# Altium PCB Alarm_V2.PcbDoc
Units mil, origin at the board's own origin, x right, y up, seen from the top; angles counter-clockwise.
Board outline 4000 x 4000 mil, 2 copper layers (Top Layer, Bottom Layer); 119 components, 88 nets, 390 pads, 48 vias.
Unrouted connection lines stored in the file: 246.
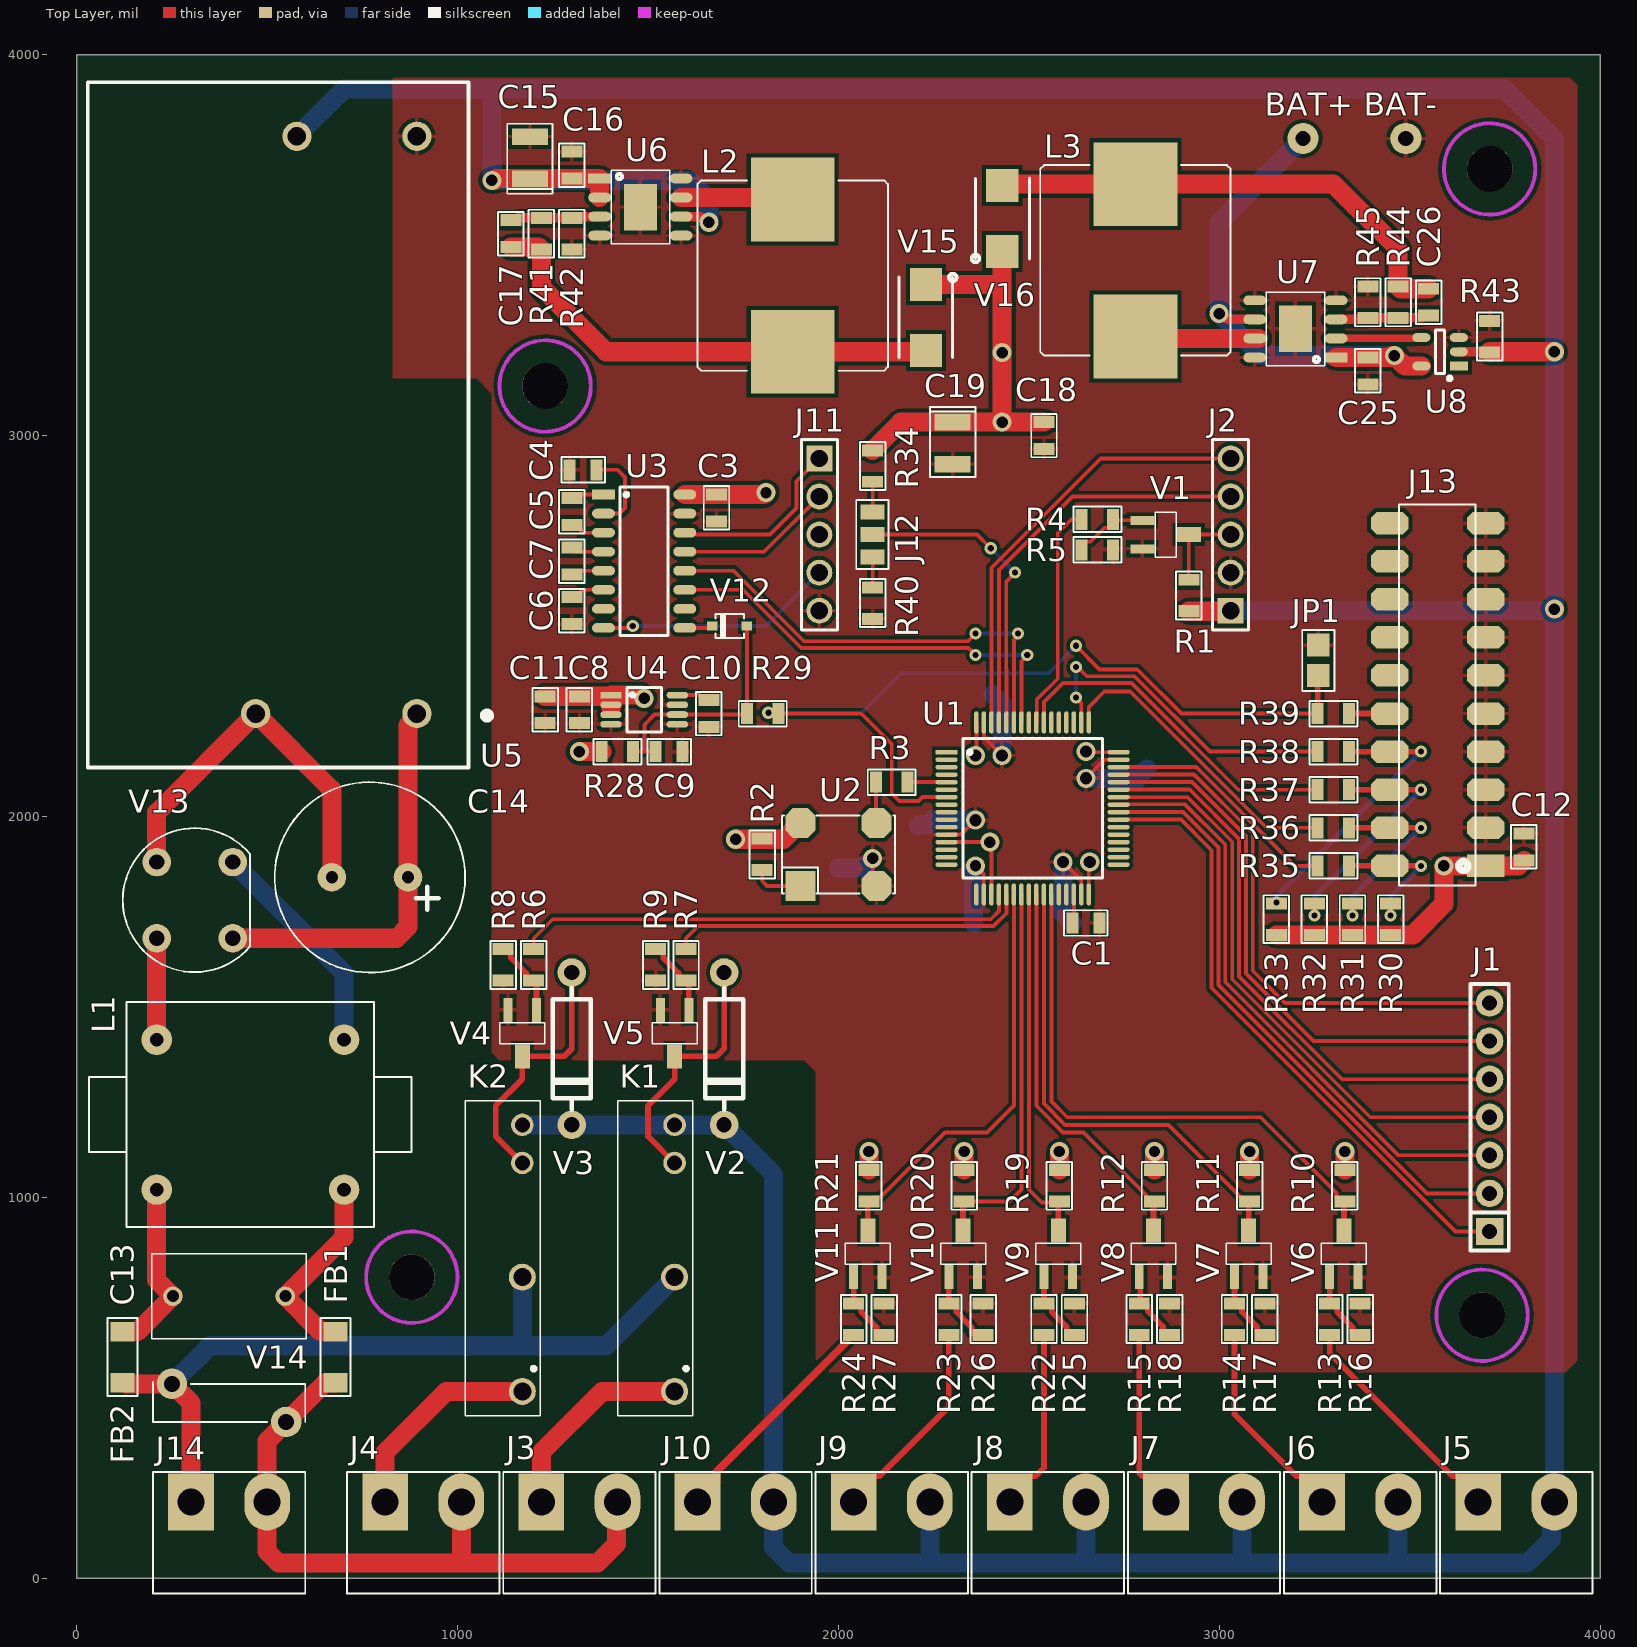
[diagram p0: Top Layer view]
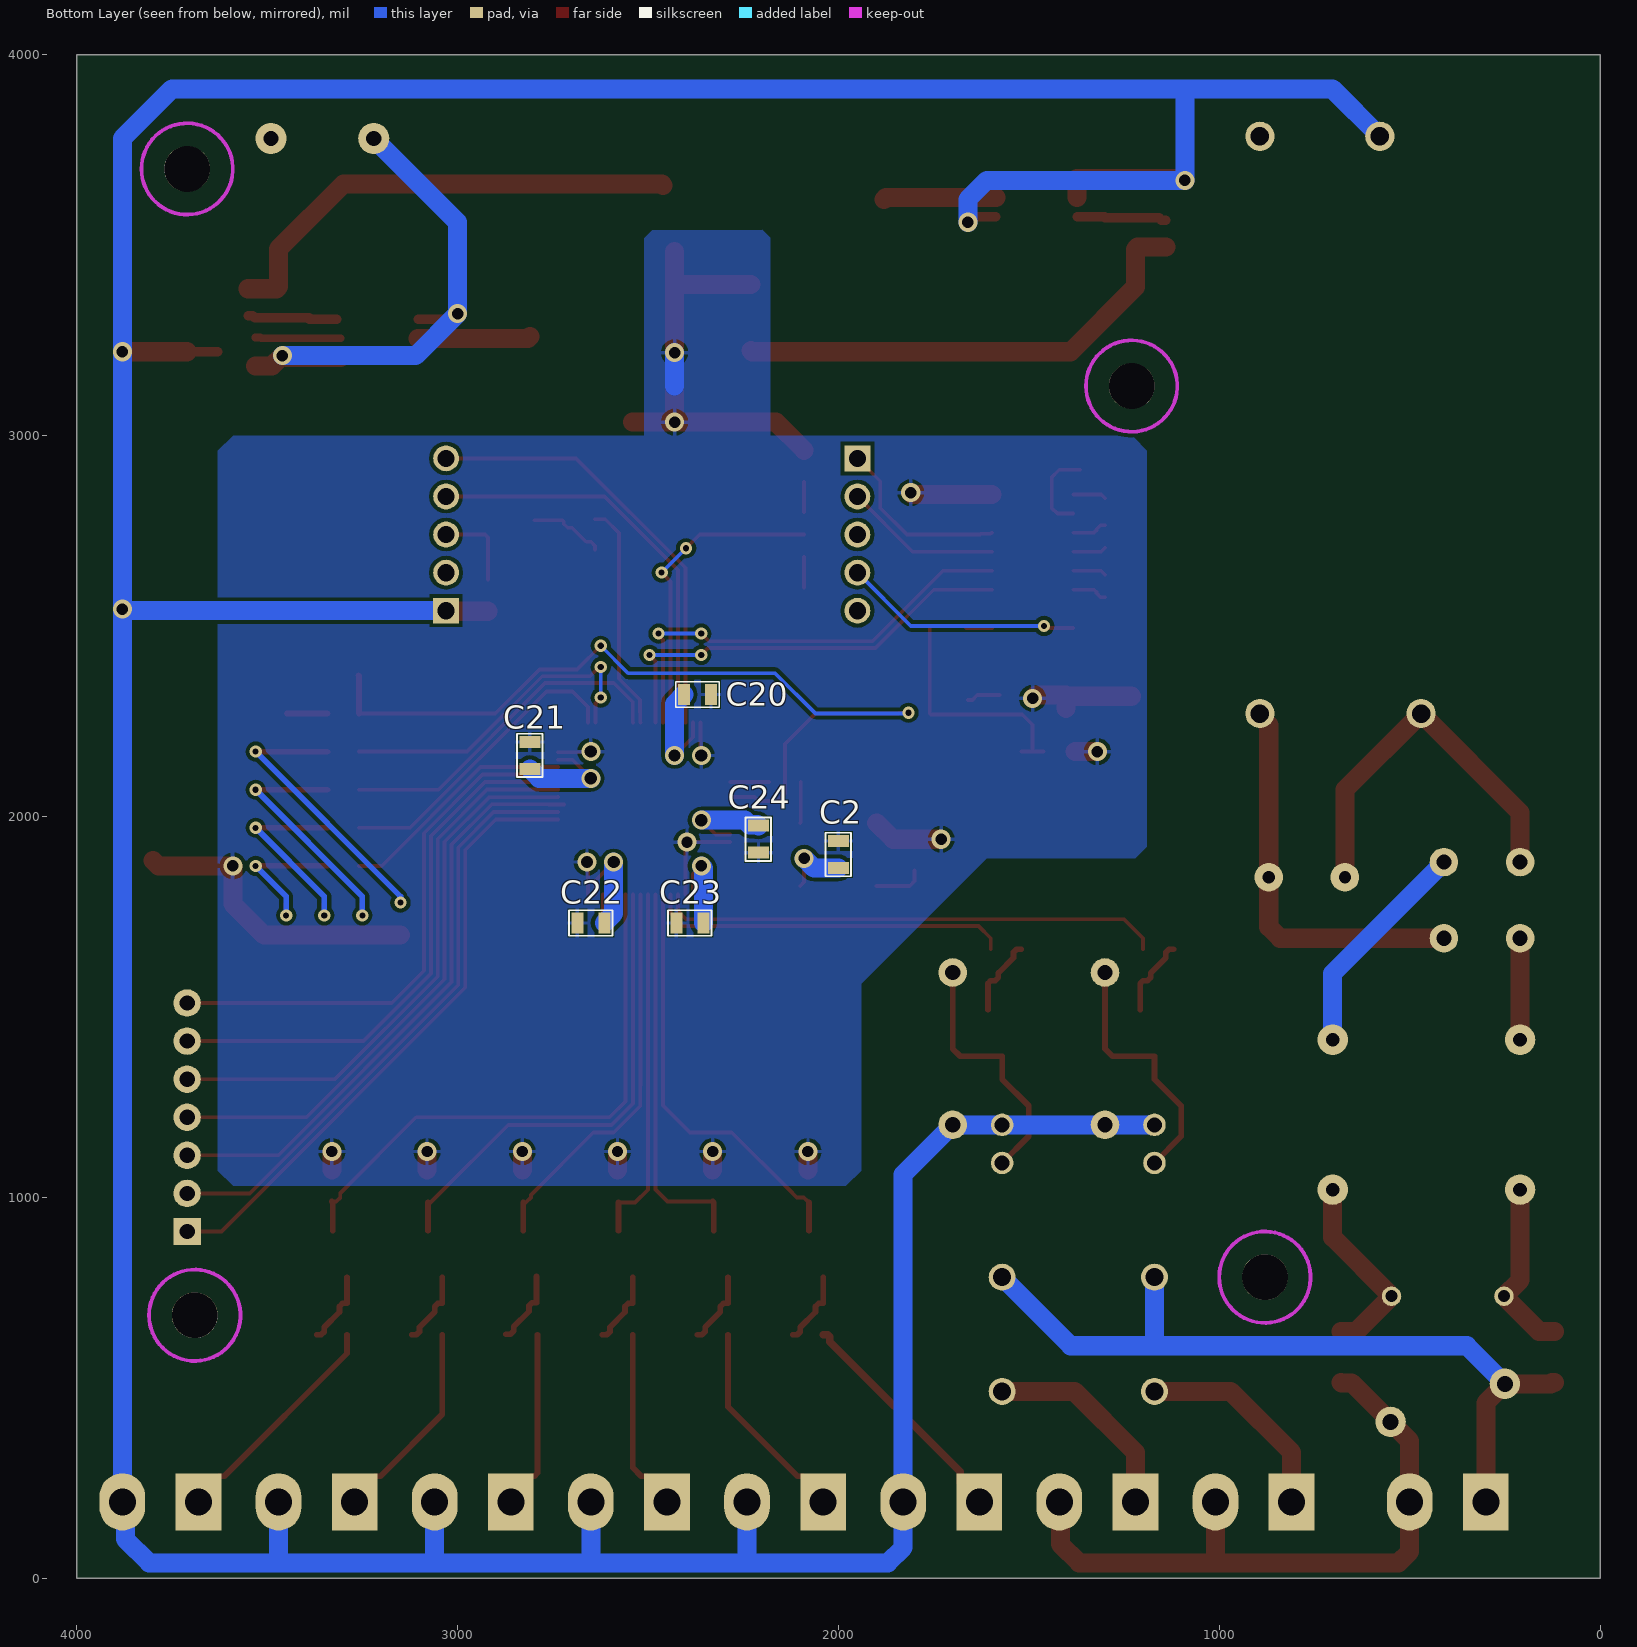
[diagram p1: Bottom Layer view, seen from below]
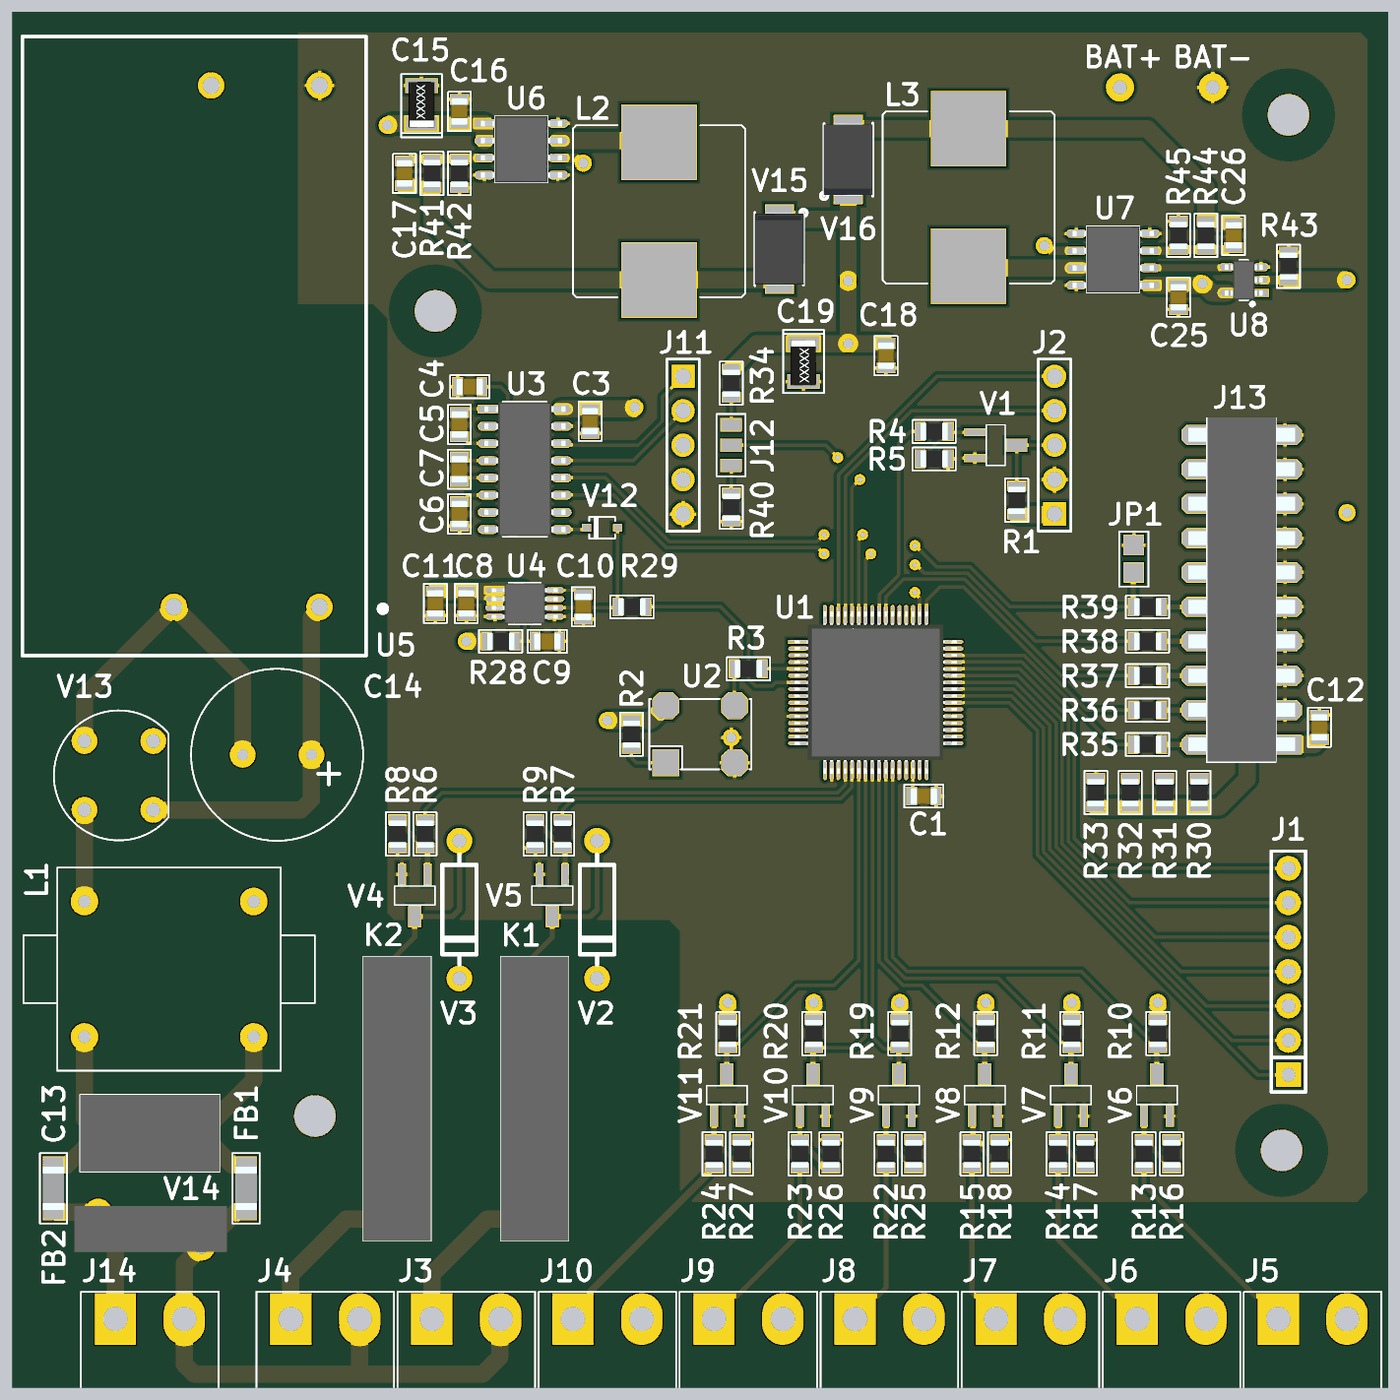
[diagram p2: 3D render of the assembled board from above, using the file's embedded part models]
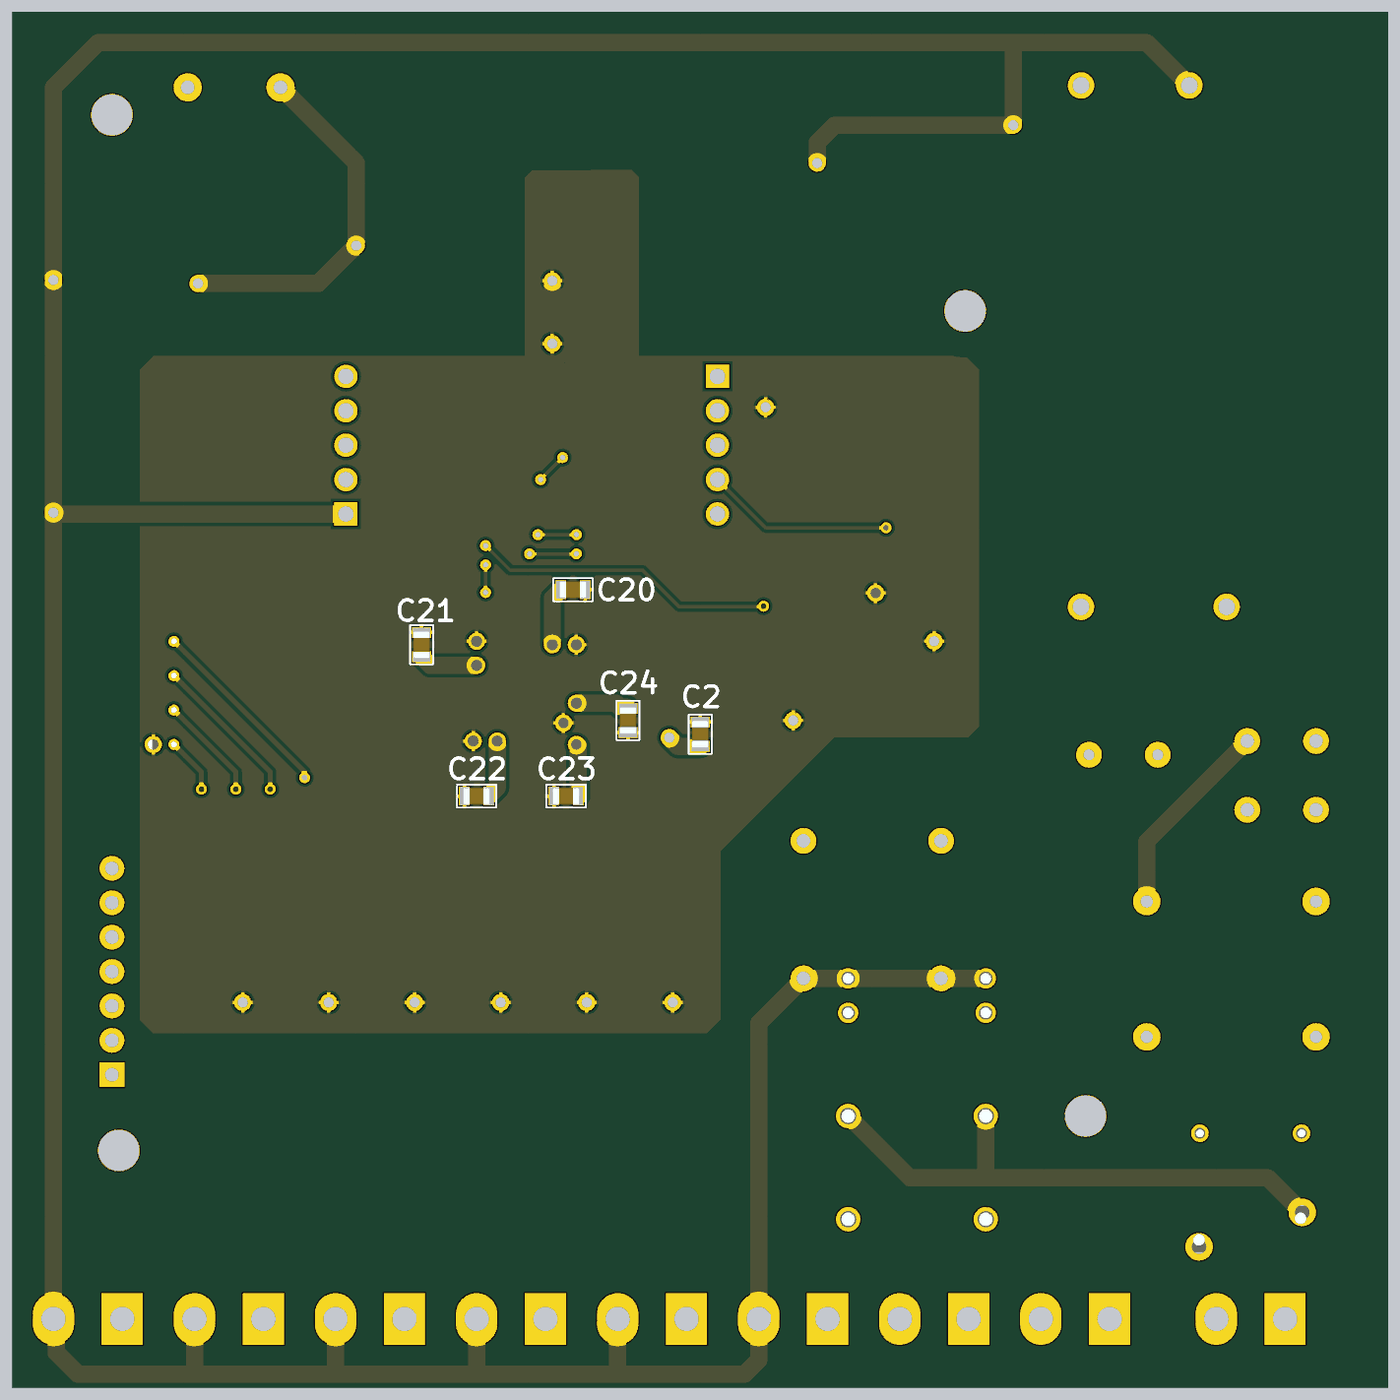
[diagram p3: 3D render of the assembled board from below, using the file's embedded part models]

## Layer stack, top to bottom
Top Solder: solder mask 0.4, Solder Resist, Dk 3.5
Top Layer: signal copper 1.4
Dielectric 1: dielectric 12.6, FR-4, Dk 4.8
Bottom Layer: signal copper 1.4
Bottom Solder: solder mask 0.4, Solder Resist, Dk 3.5

## Board outline
4000,0 0,0 0,4000 4000,4000

## Design rules (kind name [scope] priority, off if disabled: settings)
Clearance [All] p1: gap=10 ignorepadtopadclearanceinfootprint=FALSE except(0: Arc-Hole Track-Hole SMDPad-Hole THPad-Hole Via-Hole Fill-Hole Poly-Hole Region-Hole Text-Hole; 7: SMDPad-SMDPad; 8: Track-Track Track-SMDPad)
ComponentClearance Konektori [HasFootprint('CON-MSTB-5.08-2p') vs HasFootprint('CON-MSTB-5.08-2p')] p1: gap=0 collisioncheckmode=3 verticalgap=10 showdistances=FALSE
ComponentClearance [All] p2: gap=10 collisioncheckmode=3 verticalgap=10 showdistances=FALSE
HoleSize [All] p1: absolutevalues=TRUE maxlimit=1000 minlimit=1 maxpercent=80.000 minpercent=20.000
MinimumSolderMaskSliver [All] p1: minsoldermaskwidth=0
PasteMaskExpansion [All] p1: expansion=-2
PolygonConnect [All] p1: connectstyle=Relief reliefconductorwidth=10 reliefentries=4 polygonreliefangle="90 Angle" airgapwidth=10
RoomDefinition U_Programiralica [InComponentClass('U_Programiralica')] p1 off: confinementstyle=ConfineIn formatcopy=TRUE lockcomponents=FALSE outline -3000,-1000 -1000,-1000 -1000,0 -3000,0
RoomDefinition U_Napajanje [InComponentClass('U_Napajanje')] p2 off: confinementstyle=ConfineIn formatcopy=TRUE lockcomponents=FALSE outline -3000,-1000 -1000,-1000 -1000,0 -3000,0
RoomDefinition U_IO [InComponentClass('U_IO')] p3 off: confinementstyle=ConfineIn formatcopy=TRUE lockcomponents=FALSE outline -3000,-1000 -1000,-1000 -1000,0 -3000,0
RoomDefinition U_CPU [InComponentClass('U_CPU')] p4 off: confinementstyle=ConfineIn formatcopy=TRUE lockcomponents=FALSE outline -3000,-1000 -1000,-1000 -1000,0 -3000,0
RoutingVias [All] p1: holewidth=20 width=40 viastyle="Through Hole" minholewidth=16 minwidth=32 maxholewidth=32 maxwidth=50
SilkToSilkClearance [All] p1: silktosilkclearance=0
SilkToSolderMaskClearance [IsPad] p1: minsilkscreentomaskgap=0 clearancetoexposedcopper=TRUE
SolderMaskExpansion [All] p1: expansion=4 istentingtop=FALSE
Width [All] p1: maxlimit=100 minlimit=8 preferedwidth=10 minimp=50.000000 maximp=50.000000 favimp=50.000000
24 further rules are at their usual default settings.

## Classes and differential pairs
component class U_Programiralica: C3 C4 C5 C6 C7 C8 C9 C10 C11 C12 J11 J12 J13 JP1 R28 R29 R30 R31 R32 R33 R34 R35 R36 R37 R38 R39 R40 U3 U4 V12
component class U_Napajanje: BAT+ BAT- C13 C14 C15 C16 C17 C18 C19 C20 C21 C22 C23 C24 C25 C26 FB1 FB2 J14 L1 L2 L3 R41 R42 R43 R44 R45 U5 U6 U7 U8 V13 V14 V15 V16
component class U_IO: J3 J4 J5 J6 J7 J8 J9 J10 K1 K2 R6 R7 R8 R9 R10 R11 R12 R13 R14 R15 R16 R17 R18 R19 R20 R21 R22 R23 R24 R25 R26 R27 V2 V3 V4 V5 V6 V7 V8 V9 V10 V11
component class U_CPU: C1 C2 J1 J2 R1 R2 R3 R4 R5 U1 U2 V1

## Components (designator, comment, footprint, x,y, rotation, side; value= is the part's Value field where it differs from the comment)
BAT+ "VBAT" PAD_th 3220,3780 r0 top
BAT- "GND" PAD_th 3490,3780 r0 top
C1 "4.7u" CAP_0805_SMD 2650,1720 r0 top
C2 "100n" CAP_0805_SMD 2000,1900 r90 bottom
C3 "100u" CAP_0805_SMD 1680,2810 r270 top
C4 "1u" CAP_0805_SMD 1330,2910 r0 top
C5 "1u" CAP_0805_SMD 1300,2800 r270 top
C6 "1u" CAP_0805_SMD 1300,2540 r90 top
C7 "1u" CAP_0805_SMD 1300,2670 r270 top
C8 "100n" CAP_0805_SMD 1320,2280 r270 top
C9 "100u" CAP_0805_SMD 1555.43,2170 r180 top
C10 "100n" CAP_0805_SMD 1660,2270 r90 top
C11 "100n" CAP_0805_SMD 1230,2280 r90 top
C12 "100n" CAP_0805_SMD 3800,1920 r270 top
C13 "22n/250V" CAP_CK03_TH 400,740 r0 top
C14 "10u/450V" CAP_EL_ALU 770,1840 r0 top
C15 "10u" CAP_EL_CASE_B_SMD 1190,3730 r90 top
C16 "100n" CAP_0805_SMD 1300,3710 r270 top
C17 "100n" CAP_0805_SMD 1140,3530 r270 top
C18 "100n" CAP_0805_SMD 2540,3000 r90 top
C19 "10u" CAP_EL_CASE_B_SMD 2300,2980 r270 top
C20 "100n" CAP_0805_SMD 2370,2320 r180 bottom
C21 "100n" CAP_0805_SMD 2810,2160 r90 bottom
C22 "100n" CAP_0805_SMD 2650,1720 r0 bottom
C23 "100n" CAP_0805_SMD 2390,1720 r0 bottom
C24 "100n" CAP_0805_SMD 2210,1940 r270 bottom
C25 "100n" CAP_0805_SMD 3390,3170 r90 top
C26 "100n" CAP_0805_SMD 3550,3350 r90 top
FB1 "" FERITE_BEAD 680,580 r90 top
FB2 "" FERITE_BEAD 120,580 r90 top
J1 "TIPKOVNICA" CON-SIP-7 3710,910 r90 top
J2 "LCD" CON-SIP-5 3030,2540 r90 top
J3 "CON2" CON-MSTB-5.08-2p 1220,200 r0 top
J4 "CON2" CON-MSTB-5.08-2p 810,200 r0 top
J5 "CON2" CON-MSTB-5.08-2p 3680,200 r0 top
J6 "CON2" CON-MSTB-5.08-2p 3270,200 r0 top
J7 "CON2" CON-MSTB-5.08-2p 2860,200 r0 top
J8 "CON2" CON-MSTB-5.08-2p 2450,200 r0 top
J9 "CON2" CON-MSTB-5.08-2p 2040,200 r0 top
J10 "CON2" CON-MSTB-5.08-2p 1630,200 r0 top
J11 "PROG/COMM" CON-SIP-5 1950,2940 r270 top
J12 "JUMPER_3_POLE" JUMPER_3_POLE 2090,2740 r90 top
J13 "JTAG-DEBUG-10x2" JTAG-DEBUG-10x2-MOJ 3700,1870 r90 top
J14 "CON2" CON-MSTB-5.08-2p 300,200 r0 top
JP1 "JUMPER" KRATKO-LEMNI 3260,2450 r270 top
K1 "RELAY-HF49FD_012-1H12F" RELAY-HF49FD_012-1H12F 1570,490 r90 top
K2 "RELAY-HF49FD_012-1H12F" RELAY-HF49FD_012-1H12F 1170,490 r90 top
L1 "15m" CHOKE_10_12.5 210,1020 r0 top
L2 "10u/5.6A" PIS4720 1880,3620 r180 top
L3 "10u/5.6A" PIS4720 2780,3260 r0 top
R1 "100R" RES_0805_SMD 2920,2580 r270 top
R2 "10k" RES_0805_SMD 1800,1900 r270 top
R3 "22R" RES_0805_SMD 2140,2090 r0 top
R4 "4k7" RES_0805_SMD 2680,2780 r180 top
R5 "47k" RES_0805_SMD 2680,2700 r180 top
R6 "4k7" RES_0805_SMD 1200,1610 r90 top
R7 "4k7" RES_0805_SMD 1600,1610 r270 top
R8 "47k" RES_0805_SMD 1120,1610 r90 top
R9 "47k" RES_0805_SMD 1520,1610 r90 top
R10 "200R" RES_0805_SMD 3330,1030 r90 top
R11 "200R" RES_0805_SMD 3080,1030 r90 top
R12 "200R" RES_0805_SMD 2830,1030 r90 top
R13 "4k7" RES_0805_SMD 3290,680 r90 top
R14 "4k7" RES_0805_SMD 3040,680 r90 top
R15 "4k7" RES_0805_SMD 2790,680 r90 top
R16 "47k" RES_0805_SMD 3370,680 r270 top
R17 "47k" RES_0805_SMD 3120,680 r90 top
R18 "47k" RES_0805_SMD 2870,680 r270 top
R19 "200R" RES_0805_SMD 2580,1030 r90 top
R20 "200R" RES_0805_SMD 2330,1030 r90 top
R21 "200R" RES_0805_SMD 2080,1030 r90 top
R22 "4k7" RES_0805_SMD 2540,680 r270 top
R23 "4k7" RES_0805_SMD 2290,680 r90 top
R24 "4k7" RES_0805_SMD 2040,680 r270 top
R25 "47k" RES_0805_SMD 2620,680 r90 top
R26 "47k" RES_0805_SMD 2380,680 r270 top
R27 "47k" RES_0805_SMD 2120,680 r90 top
R28 "10k" RES_0805_SMD 1420,2170 r180 top
R29 "22R" RES_0805_SMD 1801.34,2270 r180 top
R30 "10k" RES_0805_SMD 3450,1730 r270 top
R31 "10k" RES_0805_SMD 3350,1730 r270 top
R32 "10k" RES_0805_SMD 3250,1730 r270 top
R33 "10k" RES_0805_SMD 3150,1730 r270 top
R34 "10k" RES_0805_SMD 2090,2920 r90 top
R35 "22R" RES_0805_SMD 3300,1870 r0 top
R36 "22R" RES_0805_SMD 3300,1970 r0 top
R37 "22R" RES_0805_SMD 3300,2070 r0 top
R38 "22R" RES_0805_SMD 3300,2170 r0 top
R39 "22R" RES_0805_SMD 3300,2270 r0 top
R40 "10k" RES_0805_SMD 2090,2560 r90 top
R41 "85k" RES_0805_SMD 1220,3530 r270 top
R42 "22k" RES_0805_SMD 1300,3530 r90 top
R43 "10k" RES_0805_SMD 3710,3260 r270 top
R44 "85k" RES_0805_SMD 3470,3350 r90 top
R45 "22k" RES_0805_SMD 3390,3350 r270 top
U1 "STM32F446RE" STM32F446RE 2510,2020 r0 top
U2 "25MHz" AQ-7050 2000,1900 r0 top
U3 "MAX3232" MAX3232 1490,2670 r0 top
U4 "LTC1726" LTC1726 1490,2280 r0 top
U5 "IRM-10-5" IRM-10-5 893.23,2270 r90 top
U6 "ST1S41" ST1S41 1480,3600 r0 top
U7 "ST1S41" ST1S41 3200,3280 r180 top
U8 "NC7SZ14" NC7SZ14 3580,3220 r180 top
V1 "BC817" SOT-23_P 2797.95,2777.4 r270 top
V2 "DIODE" DIODE-0.4_H 1700,1590 r270 top
V3 "DIODE" DIODE-0.4_H 1300,1590 r270 top
V4 "BC817" SOT-23_P 1207.4,1492.05 r180 top
V5 "BC817" SOT-23_P 1607.4,1492.05 r180 top
V6 "BC817" SOT-23_P 3290,790 r0 top
V7 "BC817" SOT-23_P 3040,790 r0 top
V8 "BC817" SOT-23_P 2790,790 r0 top
V9 "BC817" SOT-23_P 2540,790 r0 top
V10 "BC817" SOT-23_P 2290,790 r0 top
V11 "BC817" SOT-23_P 2040,790 r0 top
V12 "DIODE" SOD-323F 1760,2500 r180 top
V13 "700V, 1.5A" GRETZ 210,1680 r270 top
V14 "SIOV-S10K275" VARISTOR 250,510 r0 top
V15 "DIODE SCHOTTKY" DIODE-SCHOTTKY 2230,3310 r270 top
V16 "DIODE SCHOTTKY" DIODE-SCHOTTKY 2430,3570 r90 top

## Footprints (in the part's own frame and the unit in brackets; to place one, negate y for a bottom-side part, rotate by r counter-clockwise, add the part's x,y. Pads: shape width x height; smd on the part's side, far side on the other; paste and mask are expansions set on the pad)
AQ-7050 [mm]
  rect 2x2 smd: 1(-2.54,-2.1)
  oct 2x2 smd: 2(2.54,-2.1) 3(2.54,2.1) 4(-2.54,2.1)
  silkscreen extent -3.76,-2.6 3.78,2.6
CAP_0805_SMD [mm]
  rect 0.8x1.4 smd: 1(-0.9,0) 2(0.9,0)
  silkscreen extent -1.45,-0.85 1.45,0.85, body extent -1,-0.62 1.01,0.63, height 0.94
CAP_CK03_TH [mm]
  round 1.3 hole 0.8: 1(-3.75,0) 2(3.75,0)
  silkscreen extent -5.15,-2.85 5.15,2.85, body extent -5.15,-2.85 5.15,2.85, height 12.6
CAP_EL_ALU [mil]
  round 75 hole 32: 1(100,0) 2(-100,0)
  silkscreen extent -250,-250 250,250, body extent -245,-245 245,245, height 411
CAP_EL_CASE_B_SMD [mm]
  rect 1.1x2.4 smd: 1(-1.4,0.003) 2(1.4,-0.002)
  silkscreen extent -2.42,-1.5 2.25,1.51, body extent -1.7,-0.95 1.7,0.95, height 1.83
CHOKE_10_12.5 [mil]
  round 80 hole 36: 1(0,0) 2(492.13,0) 3(492.13,393.7) 4(0,393.7)
  silkscreen extent -177,-98 669,492, body extent -170,-99 665,491, height 787
CON-MSTB-5.08-2p [mil]
  rect 120x150 hole 70.87: 1(0,0)
  oval 120x150 hole 70.87: 2(200,0)
  silkscreen extent -100,-240 300,79
CON-SIP-5 [mm]
  rect 1.725x1.725 hole 1.15: 1(0,0)
  round 1.725 hole 1.15: 2(2.54,0) 3(5.08,0) 4(7.62,0) 5(10.16,0)
  silkscreen extent -1.27,-1.2 11.43,1.2
CON-SIP-7 [mil]
  rect 72x72 hole 40: 1(0,0)
  round 72 hole 40: 2(100,0) 3(200,0) 4(300,0) 5(400,0) 6(500,0) 7(600,0)
  silkscreen extent -50,-50 650,50
DIODE-0.4_H [mil]
  round 75 hole 40: 1(0,0) 2(400,0)
  silkscreen extent 40,-50 360,50
DIODE-SCHOTTKY [mm]
  rect 2.2x2.15 smd: 1(-2.2,0) 2(2.2,0)
  silkscreen extent -2.92,-1.81 2.7,2.03, body extent -2.7,-1.81 2.7,1.81, height 2.44
FERITE_BEAD [mm]
  rect 1.3x1.6 smd: 1(-1.7,0) 2(1.7,0)
  silkscreen extent -2.6,-1 2.6,1, body extent -1.6,-0.8 1.6,0.8, height 1.3
GRETZ [mil]
  round 75 hole 40: 1(0,0) 2(0,200) 3(-200,200) 4(-200,0)
  silkscreen extent -289,-89 89,245, body extent -290,-90 90,290, height 400
IRM-10-5 [mm]
  round 1.95 hole 1.24: 1(0,0) 2(38.5,0) 3(38.5,8) 4(0,10.75)
  silkscreen extent -3.6,-4.79 42.1,21.95, body extent -3.43,-3.3 41.91,21.72, height 21.5
JTAG-DEBUG-10x2-MOJ [mm]
  rect 1.5x2.5 smd: 1(0,0)
  oct 1.5x2.5 smd: 2(0,6.4) 3(2.54,0) 4(2.54,6.4) 5(5.08,0) 6(5.08,6.4) 7(7.62,0) 8(7.62,6.4) 9(10.16,0) 10(10.16,6.4) 11(12.7,0) 12(12.7,6.4) 13(15.24,0) 14(15.24,6.4) 15(17.78,0) 16(17.78,6.4) 17(20.32,0) 18(20.32,6.4) 19(22.86,0) 20(22.86,6.4)
  silkscreen extent -1.3,0.7 24.1,5.78, body extent -1.27,-0.73 24.13,7.13, height 10.01
JUMPER_3_POLE [mm]
  rect 1x1.6 smd: 1(-1.5,0) 2(0,0) 3(1.5,0)
  silkscreen extent -2.29,-1.07 2.3,1.09
KRATKO-LEMNI [mil]
  rect 60x60 smd: 1(0,0) 2(80,0)
  silkscreen extent -39,-42 121,43
LTC1726 [mm]
  rect 1.425x0.45 smd: 1(-2.212,0.975)
  oval 1.425x0.45 smd: 2(-2.212,0.325) 3(-2.212,-0.325) 4(-2.212,-0.975) 5(2.212,-0.975) 6(2.212,-0.325) 7(2.212,0.325) 8(2.212,0.975)
  silkscreen extent -1.15,-1.5 1.15,1.5, body extent -2.45,-1.5 2.45,1.5, height 1.1
MAX3232 [mm]
  rect 1.525x0.65 smd: 1(-2.712,4.445)
  oval 1.525x0.65 smd: 2(-2.712,3.175) 3(-2.712,1.905) 4(-2.712,0.635) 5(-2.712,-0.635) 6(-2.712,-1.905) 7(-2.712,-3.175) 8(-2.712,-4.445) 9(2.712,-4.445) 10(2.712,-3.175) 11(2.712,-1.905) 12(2.712,-0.635) 13(2.712,0.635) 14(2.712,1.905) 15(2.712,3.175) 16(2.712,4.445)
  silkscreen extent -1.6,-4.95 1.6,4.95, body extent -3,-4.95 3,4.95, height 1.75
NC7SZ14 [mm]
  rect 1.2x0.6 smd: 1(-1.25,0.95)
  oval 1.2x0.6 smd: 2(-1.25,0) 3(-1.25,-0.95) 4(1.25,-0.95) 5(1.25,0.95)
  silkscreen extent -0.76,-1.45 0.3,1.9, body extent -1.4,-1.45 1.4,1.45, height 1.45
PAD_th [mil]
  round 82 hole 40: 1(0,0)
PIS4720 [mil]
  rect 220x220 smd: 1(0,0) 2(0,400)
  silkscreen extent -250,-50 250,450
RELAY-HF49FD_012-1H12F [mm]
  round 1.8 hole 1.2: 1(0,0) 2(7.62,0)
  round 1.5 hole 1: 3(15.24,0) 4(17.78,0)
  silkscreen extent -1.61,-1.2 19.39,3.8, body extent -1.61,-1.2 19.39,3.8, height 12.9
RES_0805_SMD [mm]
  rect 0.8x1.4 smd: 1(-1.05,0) 2(1.05,0)
  silkscreen extent -1.6,-0.85 1.6,0.85, body extent -1,-0.62 1,0.63, height 0.65
SOD-323F [mm]
  rect 0.7x0.6 smd: 1(0,0) 2(2.3,0)
  silkscreen extent 0.2,-0.8 2.1,0.8
SOT-23_P [mm]
  rect 0.6x1.6 smd: 1(0,0) 2(1.9,0)
  rect 1x1.6 smd: 3(0.95,3.1)
  silkscreen extent -0.55,0.85 2.45,2.25
ST1S41 [mm]
  rect 1.525x0.65 smd: 1(-2.712,1.905)
  oval 1.525x0.65 smd: 2(-2.712,0.635) 3(-2.712,-0.635) 4(-2.712,-1.905) 5(2.712,-1.905) 6(2.712,-0.635) 7(2.712,0.635) 8(2.712,1.905)
  rect 2.2x3.1 smd: 9(0,0)
  silkscreen extent -1.95,-2.45 1.95,2.45, body extent -3,-2.45 3,2.45, height 1.7
STM32F446RE [mm]
  rect 1.475x0.3 smd: 1(-5.738,3.775)
  oval 1.475x0.3 smd: 2(-5.738,3.275) 3(-5.738,2.775) 4(-5.738,2.275) 5(-5.738,1.775) 6(-5.738,1.275) 7(-5.738,0.775) 8(-5.738,0.275) 9(-5.738,-0.225) 10(-5.738,-0.725) 11(-5.738,-1.225) 12(-5.738,-1.725) 13(-5.738,-2.225) 14(-5.738,-2.725) 15(-5.738,-3.225) 16(-5.738,-3.725) 33(5.738,-3.725) 34(5.738,-3.225) 35(5.738,-2.725) 36(5.738,-2.225) 37(5.738,-1.725) 38(5.738,-1.225) 39(5.738,-0.725) 40(5.738,-0.225) 41(5.738,0.275) 42(5.738,0.775) 43(5.738,1.275) 44(5.738,1.775) 45(5.738,2.275) 46(5.738,2.775) 47(5.738,3.275) 48(5.738,3.775)
  oval 0.3x1.475 smd: 17(-3.75,-5.713) 18(-3.25,-5.713) 19(-2.75,-5.713) 20(-2.25,-5.713) 21(-1.75,-5.713) 22(-1.25,-5.713) 23(-0.75,-5.713) 24(-0.25,-5.713) 25(0.25,-5.713) 26(0.75,-5.713) 27(1.25,-5.713) 28(1.75,-5.713) 29(2.25,-5.713) 30(2.75,-5.713) 31(3.25,-5.713) 32(3.75,-5.713) 49(3.75,5.763) 50(3.25,5.763) 51(2.75,5.763) 52(2.25,5.763) 53(1.75,5.763) 54(1.25,5.763) 55(0.75,5.763) 56(0.25,5.763) 57(-0.25,5.763) 58(-0.75,5.763) 59(-1.25,5.763) 60(-1.75,5.763) 61(-2.25,5.763) 62(-2.75,5.763) 63(-3.25,5.763) 64(-3.75,5.763)
  silkscreen extent -4.65,-4.62 4.65,4.68, body extent -6,-5.97 6,6.03, height 1.6
VARISTOR [mil]
  round 80 hole 42: 1(0,0) 2(300,-100)
  silkscreen extent -50,-100 350,5, body extent -69,-115 374,18, height 634

## Part data
BAT+ BAT-: library part PAD, "Single pad"
C1 C2 C3 C4 C5 C6 C7 C8 C9 C10 C11 C12 C16 C17 C18 C20 C21 C22 C23 C24 C25 C26: library part CAP, "0805"
C13: library part CAP_CK03, "MKX2AW24702F00KSSD", Manufacturer_Name=WIMA, Mouser2 Part Number=505-MKX2AW24702F00KS, Datasheet Link=https://componentsearchengine.com//MKX2AW24702F00KSSD.pdf, Height=12.5mm, Manufacturer_Part_Number=MKX2AW24702F00KSSD, Mouser2 Price/Stock=https://www.mouser.com/Search/Refine.aspx?Keyword=505-MKX2AW24702F00KS
C14 C15 C19: library part CAP_EL, "ELECTROLYTIC TH, CASE B"
FB1 FB2: library part FERITE_BEAD, "SMFS1270-100"
J1: library part CON7, "7 Pin connector"
J2 J11: library part CON5, "5 Pin connector"
J12: "3 Pole jumper"
J13: library part CON-JTAG-10x2
JP1: "Jumper"
L1: library part CHOKE, "871-B82731M290"
L2 L3: library part INDUCTOR, "Inductor"
R1 R2 R3 R4 R5 R6 R7 R8 R9 R10 R11 R12 R13 R14 R15 R16 R17 R18 R19 R20 R21 R22 R23 R24 R25 R26 R27 R28 R29 R30 R31 R32 R33 R34 R35 R36 R37 R38 R39 R40 R41 R42 R43 R44 R45: library part RES, "0805"
U1: "STM microcontroller"
U2: library part OSCILATOR, "Oscillator"
U3: "RS232 chip"
U8: "Invertor"
V1 V4 V5 V6 V7 V8 V9 V10 V11: "NPN tranzistor BC-817"
V13: library part GRETZ, "W10G"
V14: library part VARISTOR
V15 V16: "Schottky diode"

## Free pads (board coordinates)
  round 120 hole 120: 2(1230,3130) 2(3710,3700) 3(3690,690) 4(880,790)

## Via types
v1: diameter 50, hole 30, Top Layer to Bottom Layer, 22 vias
v2: diameter 32, hole 16, Top Layer to Bottom Layer, 19 vias
v3: diameter 50, hole 32, Top Layer to Bottom Layer, 7 vias

## Nets (pads, with @x,y where several pads share a name; then routed paths per layer and width w, separated by ;. In a path a pad name is that pad's centre, name@x,y a point inside that pad or via, vN(x,y) a via of type N, cw(c..) or ccw(c..) an arc to the next point about the centre after c; other vN are vias at no path point)
3V3D: C2.2 C3.1 C8.1 C11.2 C12.2 C18.2 C19.1 C20.2 C21.2 C22.2 C23.2 C24.2 J13.1 R2.1 R10.2 R11.2 R12.2 R19.2 R20.2 R21.2 R28.2 R30.2 R31.2 R32.2 R33.2 R34.2 U1.13 U1.19 U1.32 U1.48 U1.64 U2.4 U3.16 U4.1 U4.2 U4.3 V15.1 V16.1 | length 3587.7
  Top Layer w10: U1.13 v1(2397.58,1932.42) 2401.73,1928.27 U1.19 ; v3(2360,2160) 2362.36,2162.36 U1.64 ; v3(2650,2170) 2651.36,2168.64 U1.48 ; U1.32 2657.64,1887.64 2660,1885.28 v3(2660,1880)
  Top Layer w50: C11.2 C8.1 U4.1@1402.91,2315.43 ; v1(1320,2170) R28.2 ; 1402.91,2283.47 U4.2 U4.1@1402.91,2315.43 ; v1(1490,2310) 1481.61,2318.39 U4.1 U4.1@1402.91,2315.43 ; U3.16 1805,2845 v1(1810,2850) ; v1(1730,1940) 1856.34,1940 1899.02,1982.68 U2.4 ; R21.2 v1(2080,1120) ; R34.2 2163.78,3035.12 C19.1 v1(2430,3035.12) ; V15.1 2426.61,3396.61 2430,3400 ; R20.2 v1(2330,1120) ; V16.1 2430,3400 ; C18.2 2539.69,3035.12 v1(2430,3035.12) ; R19.2 v1(2580,1120) ; R12.2 v1(2830,1120) ; R11.2 v1(3080,1120) ; R33.2 R32.2 R31.2 3508.66,1688.66 3590,1770 v1(3590,1870) J13.1 3785.43,1870 C12.2 ; R10.2 v1(3330,1120) ; v1(2430,3035.12) v1(2430,3217.56) 2430,3400
  Bottom Layer w50: 2430,3130 v1(2430,3217.56)
5Vin: C15.1 C16.2 J2.1 J5.2 J6.2 J7.2 J8.2 J9.2 J10.2 K1.4 K2.4 R1.2 R43.2 U5.3 U6.1 U6.2 U6.6 U8.2 V2.2 V3.2 | length 14028.8
  Top Layer w25: U6.6 1638.24,3575 1653.24,3560 v1(1660,3560) ; U8.2 R43.2@3710,3220
  Top Layer w50: v1(1090,3670) 1096.76,3670 1101.65,3674.88 C15.1 1373.11,3674.88 1373.23,3674.76 U6.2 ; R1.2 3028.66,2538.66 J2.1 ; R43.2@3710,3220 v1(3880,3220)
  Bottom Layer w50: U5.3 702.52,3910 3750,3910 3880,3780 v1(3880,3220) v1(3880,2544) ; 1090,3910 v1(1090,3670) 1610,3670 1660,3620 v1(1660,3560) ; K2.4 V3.2 K1.4 V2.2 1830,1060 J10.2 1830,80 1870,40 2240,40 ; J9.2 2240,40 ; J8.2 2650,40 ; J2.1 3876,2540 v1(3880,2544) ; J7.2 3060,40 ; J6.2 3470,50 3480,40 ; 2240,40 2650,40 ; 2650,40 3060,40 ; 3060,40 3480,40 ; 3480,40 3810,40 3872.04,102.04 3872.04,192.04 J5.2 v1(3880,2544)
230VAC: FB1.1 J3.2 J4.2 J14.2 V14.2 | length 1759.8
  Top Layer w50: FB1.1 679.41,512.48 652.48,512.48 V14.2 500,360 J14.2 500,69.29 529.29,40 1000,40 ; J4.2 1010,50 1000,40 ; J3.2 1417.04,197.04 1417.04,89.29 1367.75,40 1000,40
ANODE: J2.3 R1.1 V1.3 | length 224
  Top Layer w10: R1.1 2920,2732 2928,2740 J2.3
DGND: BAT-.1 C1.2 C2.1 C3.2 C4.1 C6.1 C8.2 C9.1 C10.1 C11.1 C12.1 C15.2 C16.1 C18.1 C19.2 C20.1 C21.1 C22.1 C23.1 C24.1 C25.1 J2.2 J11.5 J13.3 J13.5 J13.7 J13.9 J13.11 J13.13 J13.15 J13.17 J13.19 JP1.1 R5.1 R8.1 R9.1 R16.1 R17.2 R18.1 R25.2 R26.1 R27.2 R40.1 R42.1 R43.1 R45.1 U1.12 U1.18 U1.31 U1.47 U1.63 U2.2 U3.15 U4.4 U4.5 U4.7 U5.2 U6.4 U6.5 U6.8 U6.9 U7.4 U7.5 U7.8 U7.9 U8.3 V1.2 V4.2 V5.2 V6.2 V7.2 V8.2 V9.2 V10.2 V11.2 | length 1489.5
  Top Layer w10: v1(2090,1890) 2090,1827.32 U2.2 ; U1.12 2322.1,1952.1 v3(2360,1990) ; v1(2360,1870) 2381.7,1848.3 2381.7,1795.44 U1.18 ; U1.63 2382.05,2207.95 v3(2430,2160) ; v3(2590,1880) 2637.95,1832.05 U1.31 ; v3(2650,2100) 2698.95,2148.95 U1.47
  Bottom Layer w50: C2.1 2064.57,1864.57 v1(2090,1890) ; C24.1 2212.56,1977.99 2233.6,1977.99 2245.6,1990 v3(2360,1990) ; C23.1 2354.57,1864.57 v1(2360,1870) ; C20.1 2430,2295.43 v3(2430,2160) ; v3(2590,1880) 2590,1744.57 C22.1 ; v3(2650,2100) 2785.43,2100 C21.1
GNDAC: FB2.1 J14.1 K1.2 K2.2 V14.1 | length 2078
  Top Layer w50: FB2.1 125.91,513.07 128.98,510 V14.1 300,460 J14.1
  Bottom Layer w50: V14.1 350,610 1170,610 ; K2.2 1170,610 ; K1.2 1390,610 1170,610
LCD_SCL: J2.4 U1.61 | length 1088.5
  Top Layer w10: U1.61 2421.42,2646.87 2614.54,2840 J2.4
LCD_SCREEN: R4.2 U1.56 | length 597.9
  Top Layer w10: U1.56 2520.19,2247.25 2520.19,2271.66 2520.62,2272.1 2520.62,2306.08 2576,2361.46 2576,2744 2612,2780 R4.2
LCD_SDA: J2.5 U1.62 | length 1153
  Top Layer w10: U1.62 2401.73,2652.64 2689.09,2940 J2.5
NetC1_1: C1.1 U1.30 | length 76.6
  Top Layer w10: C1.1 2618.27,1723.7 U1.30
NetC4_2: C4.2 U3.2 | length 225.8
  Top Layer w10: C4.2 1420,2910 1440,2890 1440,2810 1425,2795 U3.2
NetC5_1: C5.1 U3.1 | length 87.2
  Top Layer w10: C5.1 1309.57,2845 U3.1
NetC5_2: C5.2 U3.3 | length 93.1
  Top Layer w10: C5.2 1311.81,2764.57 1322.56,2753.82 1322.56,2750.86 1328.42,2745 U3.3
NetC6_2: C6.2 U3.6 | length 93.1
  Top Layer w10: C6.2 1311.81,2575.43 1322.56,2586.18 1322.56,2589.14 1328.42,2595 U3.6
NetC7_1: C7.1 U3.4 | length 87.5
  Top Layer w10: C7.1 1310.43,2695 U3.4
NetC7_2: C7.2 U3.5 | length 87.5
  Top Layer w10: C7.2 1310.43,2645 U3.5
NetC9_2: C9.2 R28.1 R29.2 U4.6 V12.1 | length 640.8
  Top Layer w10: R28.1 1490.67,2170 ; C9.2 1490.67,2170 ; V12.1 R29.2 1757.2,2267.2 U4.6 1517.2,2267.2 1490.67,2240.67 1490.67,2170
NetC10_2: C10.2 U4.8 | length 88.3
  Top Layer w10: U4.8 1635.24,2318.39 1648.19,2305.43 C10.2
NetC13_1: C13.1 FB2.2 L1.1 | length 468.5
  Top Layer w50: FB2.2 120.59,647.52 159.88,647.52 C13.1 210,782.36 L1.1
NetC13_2: C13.2 FB1.2 L1.2 | length 514.9
  Top Layer w50: FB1.2 679.41,647.52 640.12,647.52 C13.2 702.13,894.49 L1.2
NetC14_1: C14.1 U5.1 V13.2 | length 1042
  Top Layer w50: V13.2 840,1680 870,1710 C14.1 870,2239.53 893.23,2262.76 U5.1
NetC14_2: C14.2 U5.4 V13.4 | length 1010.5
  Top Layer w50: V13.4 210,2010 U5.4 670,2070 C14.2
NetC17_1: C17.1 R41.1 R42.2 U6.3 | length 235.7
  Top Layer w25: C17.1 1151.81,3565.43 1157.72,3571.34 R41.1 R42.2 ; R42.2@1300,3575 U6.3
NetC17_2: C17.2 L2.2 R41.2 V15.2 | length 1262.9
  Top Layer w50: C17.2 1214.09,3494.57 R41.2 1220,3390 1390,3220 L2.2 2226.61,3220 V15.2
NetC26_1: C26.1 R44.1 R45.2 U7.3 | length 235.7
  Top Layer w25: U7.3@3316.77,3305 R45.2@3390,3305 ; R45.2 R44.1 3532.28,3308.66 3538.19,3314.57 C26.1
NetC26_2: C26.2 L3.2 R44.2 V16.2 | length 1262.9
  Top Layer w50: V16.2@2460,3656.61 2463.39,3660 2810,3660 3300,3660 3470,3490 R44.2 3475.91,3385.43 C26.2
NetJ3_1: J3.1 K1.1 | length 556.3
  Top Layer w50: J3.1 1220,330 1380,490 K1.1@1580,490
NetJ4_1: J4.1 K2.1 | length 556.3
  Top Layer w50: J4.1 810,330 970,490 K2.1
NetJ5_1: J5.1 R13.1 | length 609
  Top Layer w15: R13.1 3290,590 3612.5,267.5 3627.5,267.5 3680,215 J5.1
NetJ6_1: J6.1 R14.1 | length 542.7
  Top Layer w15: R14.1 3040,430 3202.5,267.5 3217.5,267.5 3270,215 J6.1
NetJ7_1: J7.1 R15.1 | length 472.8
  Top Layer w15: R15.1 2790,276.29 2798.79,267.5 2807.5,267.5 2860,215 J7.1
NetJ8_1: J8.1 R22.2 | length 484.7
  Top Layer w15: J8.1 2450,215 2502.5,267.5 2517.5,267.5 2540,290 R22.2
NetJ9_1: J9.1 R23.1 | length 551
  Top Layer w15: J9.1 2040,215 2092.5,267.5 2107.5,267.5 2290,450 R23.1
NetJ10_1: J10.1 R24.2 | length 615.4
  Top Layer w20: J10.1 1680,250 1680,278.66 2022.44,621.1 2022.44,632.91 2028.19,638.66 R24.2
NetJ12_1: J12.1 R40.2 | length 79.6
  Top Layer w10: R40.2 J12.1
NetJ12_2: J12.2 U1.60 | length 818.1
  Top Layer w10: J12.2 2364,2740 v2(2400,2704) ; U1.60 2441.1,2385.81 2441,2385.91 2441,2617 v2(2464,2640)
  Bottom Layer w10: v2(2400,2704) v2(2464,2640)
NetJ12_3: J12.3 R34.1 | length 79.6
  Top Layer w10: J12.3 R34.1
NetJ13_2: J13.2 R30.1 R35.2 | length 383.1
  Top Layer w15: R35.2 J13.2 v2(3530,1870) ; v2(3450,1740) R30.1
  Bottom Layer w15: v2(3450,1740) 3450,1790 v2(3530,1870)
NetJ13_4: J13.4 R31.1 R36.2 | length 524.6
  Top Layer w15: R36.2 J13.4 v2(3530,1970) ; v2(3350,1740) R31.1
  Bottom Layer w15: v2(3350,1740) 3350,1790 v2(3530,1970)
NetJ13_6: J13.6 R32.1 R37.2 | length 666
  Top Layer w15: v2(3250,1740) R32.1 ; R37.2 J13.6 v2(3530,2070)
  Bottom Layer w15: v2(3250,1740) 3250,1790 v2(3530,2070)
NetJ13_8: J13.8 R33.1 R38.2 | length 742.5
  Top Layer w15: R38.2 J13.8 v2(3530,2170)
  Bottom Layer w15: v2(3150,1773.59) 3150,1790 v2(3530,2170)
NetJ13_10: J13.10 R39.2 | length 106.7
  Top Layer w15: R39.2 J13.10
NetJP1_2: JP1.2 R29.1 R39.1 U1.7 | length 2336.2
  Top Layer w10: v2(1816,2272) 1840.68,2272 R29.1 2060,2270 2140,2190 2140,2060 2160,2040 2210,2040 2220.53,2050.53 U1.7 ; v2(2624,2448) 2686,2386 2784.91,2386 2900.91,2270 R39.1
  Top Layer w15: R39.1 3258.66,2368.66 JP1.2
  Bottom Layer w10: v2(1816,2272) 1818,2270 2060,2270 2166,2376 2552,2376 v2(2624,2448)
NetK1_3: K1.3 V2.1 V5.3 | length 676.3
  Top Layer w15: K1.3 1500,1160 1500,1240 1570,1310 V5.3 1680,1370 1700,1390 V2.1
NetK2_3: K2.3 V3.1 V4.3 | length 676.3
  Top Layer w15: K2.3 1100,1160 1100,1240 1170,1310 V4.3 1280,1370 1300,1390 V3.1
NetL1_3: L1.3 V13.3 | length 587.3
  Bottom Layer w50: V13.3 702.13,1587.87 L1.3
NetL1_4: L1.4 V13.1 | length 266.3
  Top Layer w50: L1.4 V13.1
NetL2_1: L2.1 U6.7 | length 295.3
  Top Layer w50: U6.7 1875,3625 L2.1
NetL3_1: L3.1 U7.7 | length 295.3
  Top Layer w50: L3.1@2810,3260 2815,3255 U7.7@3103.23,3255
NetR2_2: R2.2 U2.1 | length 133.9
  Top Layer w10: R2.2 1800,1830 1812.68,1817.32 U2.1
NetR3_1: R3.1 U2.3 | length 107.9
  Top Layer w10: R3.1 2098.66,1984.02 U2.3
NetR3_2: R3.2 U1.5 | length 102.8
  Top Layer w10: R3.2 2283.99,2090 U1.5
NetR4_1: R4.1 R5.2 V1.1 | length 200.7
  Top Layer w10: R5.2 2638.66,2710.17 2649.41,2720.92 2662.26,2720.92 2699.08,2757.74 2710.59,2757.74 2721.34,2768.49 2721.34,2774.24 2724.5,2777.4 V1.1
NetR6_1: R6.1 R8.2 V4.1 | length 209.3
  Top Layer w15: R8.2 1131.81,1651.34 1140.06,1643.09 1140.06,1628.6 1179.94,1588.72 1179.94,1576.91 1188.19,1568.66 R6.1 1207.4,1561.26 V4.1
NetR6_2: R6.2 U1.20 | length 1323.3
  Top Layer w10: R6.2 1200,1680 1250,1730 2400,1730 2421.42,1751.42 U1.20
NetR7_1: R7.1 U1.21 | length 946.4
  Top Layer w10: R7.1 1600,1680 1632,1712 2407.46,1712 2441.1,1745.65 U1.21
NetR7_2: R7.2 R9.2 V5.1 | length 209.3
  Top Layer w15: R9.2 1531.81,1651.34 1540.06,1643.09 1540.06,1628.6 1579.94,1588.72 1579.94,1576.91 1588.19,1568.66 R7.2 1607.4,1561.26 V5.1
NetR10_1: R10.1 U1.27 V6.3 | length 1507.6
  Top Layer w10: U1.27 2559.21,1251.7 2600.91,1210 3108.66,1210 3307.74,1010.92 3307.74,999.41 3318.49,988.66 R10.1
  Top Layer w15: V6.3 3327.4,986.06 R10.1
NetR11_1: R11.1 U1.26 V7.3 | length 1268.7
  Top Layer w10: U1.26 2539.53,1245.93 2595.46,1190 2866.85,1190 3057.44,999.41 3070.79,986.06 R11.1@3077.4,986.06
  Top Layer w15: V7.3 R11.1@3077.4,986.06
NetR12_1: R12.1 U1.25 V8.3 | length 1045.6
  Top Layer w10: U1.25 2519.84,1293.62 2520,1293.46 2520,1240 2590,1170 2643.46,1170 2807.44,1006.02 2807.44,999.41 2820.79,986.06 R12.1@2827.4,986.06
  Top Layer w15: V8.3 R12.1@2827.4,986.06
NetR13_2: R13.2 R16.2 V6.1 | length 198.3
  Top Layer w15: V6.1 R13.2 3301.81,721.34 3310.06,713.09 3310.06,698.6 3349.94,658.72 3349.94,646.91 3358.19,638.66 R16.2
NetR14_2: R14.2 R17.1 V7.1 | length 198.3
  Top Layer w15: V7.1 R14.2 3051.81,721.34 3060.06,713.09 3060.06,698.6 3099.94,658.72 3099.94,646.91 3108.19,638.66 R17.1
NetR15_2: R15.2 R18.2 V8.1 | length 198.3
  Top Layer w15: V8.1@2792.57,791.72 2792.57,723.06 2804.38,723.06 2812.63,714.81 2812.63,700.32 2852.51,660.44 2852.51,648.63 2860.76,640.38 R18.2@2872.57,640.38
NetR19_1: R19.1 U1.24 V9.3 | length 940.5
  Top Layer w10: U1.24 2500.16,1019.84 2533.94,986.06 R19.1@2577.4,986.06
  Top Layer w15: V9.3 R19.1@2577.4,986.06
NetR20_1: R20.1 U1.23 V10.3 | length 1016
  Top Layer w10: R20.1 2448.66,988.66 2480.47,1020.47 U1.23
  Top Layer w15: V10.3 2327.4,986.06 R20.1
NetR21_1: R21.1 U1.22 V11.3 | length 1117.2
  Top Layer w10: R21.1@2077.4,986.06 R21.1 2090.75,999.41 2109.41,999.41 2130,1020 2280,1170 2390,1170 2460.79,1240.79 U1.22
  Top Layer w15: V11.3 R21.1@2077.4,986.06
NetR22_1: R22.1 R25.1 V9.1 | length 198.3
  Top Layer w15: V9.1 R22.1 2551.81,721.34 2560.06,713.09 2560.06,698.6 2599.94,658.72 2599.94,646.91 2608.19,638.66 R25.1
NetR23_2: R23.2 R26.2 V10.1 | length 198.3
  Top Layer w15: V10.1 R23.2 2301.81,721.34 2310.06,713.09 2310.06,698.6 2349.94,658.72 2349.94,646.91 2358.19,638.66 R26.2@2370,638.66
NetR24_1: R24.1 R27.1 V11.1 | length 198.3
  Top Layer w15: V11.1 R24.1 2051.81,721.34 2060.06,713.09 2060.06,698.6 2099.94,658.72 2099.94,646.91 2108.19,638.66 R27.1
NetR35_1: R35.1 U1.46 | length 630.1
  Top Layer w10: U1.46 2939.82,2129.27 3199.09,1870 R35.1
NetR36_1: R36.1 U1.49 | length 806.8
  Top Layer w10: U1.49 2657.64,2287.64 2698,2328 2766.54,2328 3124.54,1970 R36.1
NetR37_1: R37.1 U1.55 | length 908.6
  Top Layer w10: U1.55 2539.87,2247.25 2539.87,2271.66 2540,2271.79 2540,2300 2590,2350 2770,2350 3050,2070 R37.1
NetR38_1: R38.1 U1.50 | length 879.1
  Top Layer w10: v2(2624,2312) 2624,2310.05 2637.95,2296.09 U1.50 ; v2(2624,2392) 2628,2392 2652,2368 2777.46,2368 2975.46,2170 R38.1
  Bottom Layer w10: v2(2624,2312) 2626,2314 2624,2316 v2(2624,2392)
NetU1_58: U1.58 U3.11 | length 1153.6
  Top Layer w10: U3.11 1749.54,2595 1902.54,2442 2342,2442 v2(2360,2424) ; U1.58 2480.47,2407.14 2496,2422.67 v2(2496,2424)
  Bottom Layer w10: v2(2360,2424) v2(2496,2424)
NetU1_59: U1.59 U3.12 | length 1197.9
  Top Layer w10: U3.12 1725,2645 1910,2460 2340,2460 v2(2360,2480) ; U1.59 2460.79,2463.14 2472,2474.35 v2(2472,2480)
  Bottom Layer w10: v2(2360,2480) v2(2472,2480)
NetU3_9: U3.9 V12.2 | length 74.7
  Top Layer w10: U3.9 1664.45,2495 V12.2
NetU7_2: U7.2 U8.4 | length 225
  Top Layer w20: U7.2 3515.59,3255 3518,3257.4 U8.4
PIN1: J1.1 U1.39 | length 1633.5
  Top Layer w10: U1.39 2735.94,1991.44 2899.46,1991.44 2980,1910.9 2980,1550 3620,910 J1.1
PIN2: J1.2 U1.40 | length 1600.2
  Top Layer w10: U1.40 2905.2,2011.16 2998,1918.35 2998,1557.46 3545.46,1010 J1.2
PIN3: J1.3 U1.41 | length 1582.9
  Top Layer w10: U1.41@2720.43,2031.19 2760.66,2031.19 2761.1,2031.62 2910.19,2031.62 3016,1925.81 3016,1564.91 3470.91,1110 J1.3
PIN4: J1.4 U1.42 | length 1533.7
  Top Layer w10: U1.42 2736.25,2050.18 2760.66,2050.18 2760.84,2050 2917.27,2050 3034,1933.27 3034,1572.37 3396.37,1210 J1.4
PIN5: J1.5 U1.43 | length 1500.4
  Top Layer w10: U1.43 2922.51,2070.21 3052,1940.72 3052,1579.82 3321.82,1310 J1.5
PIN6: J1.6 U1.44 | length 1467.1
  Top Layer w10: U1.44 2928.28,2089.9 3070,1948.18 3070,1587.28 3247.28,1410 J1.6
PIN7: J1.7 U1.45 | length 1433.9
  Top Layer w10: U1.45 2934.05,2109.58 3088,1955.63 3088,1594.73 3172.73,1510 J1.7
PROG_RESET: J11.4 U3.8 | length 626.8
  Top Layer w10: U3.8 1449.05,2495 1454.05,2500 v2(1460,2500)
  Bottom Layer w10: v2(1460,2500) 1810,2500 J11.4
PROG_RX: J11.2 U3.13 | length 413.3
  Top Layer w10: U3.13 1805,2695 J11.2
PROG_TX: J11.1 U3.14 | length 479.1
  Top Layer w10: U3.14 1599.75,2742.02 1625.63,2742.02 1627.65,2740 1820,2740 1890,2810 1890,2880 J11.1
VBAT: BAT+.1 C25.2 U7.1 U7.6 U8.5 | length 1403.7
  Top Layer w25: v1(3000,3320) 3006.76,3320 3021.76,3305 U7.6 U7.6@3103.23,3305
  Top Layer w50: U7.1 3448.24,3205 3453.24,3210 v1(3460,3210) 3487.4,3182.6 U8.5 ; U7.1@3316.77,3205.24 U7.1@3316.89,3205.12
  Bottom Layer w50: BAT+.1 3000,3560 v1(3000,3320) 3110,3210 v1(3460,3210)
pads on no net: J11.3 J13.12 J13.14 J13.16 J13.18 J13.20 U1.1 U1.2 U1.3 U1.4 U1.6 U1.8 U1.9 U1.10 U1.11 U1.14 U1.15 U1.16 U1.17 U1.28 U1.29 U1.33 U1.34 U1.35 U1.36 U1.37 U1.38 U1.51 U1.52 U1.53 U1.54 U1.57 U3.7 U3.10 U8.1

## Polygon pours and split planes (outlines as drawn)
3V3D on Bottom Layer "3V3D_L02_P000" (solid, remove dead copper, pour order 0): 1230,3000 2178.79,3000 2178.79,3518.79 2200,3540 2489.16,3539.16 2510,3518.32 2510,3000 3589.48,3000 3629.48,2960 3629.48,1070 3589.48,1030 1980,1030 1940,1070 1940,1560 1610,1890 1220,1890 1190,1920 1190,2960
DGND on Top Layer "DGND_L01_P001" (solid, remove dead copper, pour order 1): 3920,3940 3940,3920 3940,570 3910,540 1940,540 1940,1330 1910,1360 1110,1360 1090,1380 1090,3110 1050,3150 830,3150 830,3940

## Keep-outs
Keep-Out Layer:
  circle w10: c3710,3700 r120
  circle w10: c1230,3130 r120
  circle w10: c3690,690 r120
  circle w10: c880,790 r120